# Altium PCB Rangkaian_Relay.PcbDoc
Units mm, origin at the board's own origin, x right, y up, seen from the top; angles counter-clockwise.
Board outline 152.4 x 101.6 mm, 2 copper layers (Top Layer, Bottom Layer); 8 components, 9 nets, 23 pads, 0 vias.
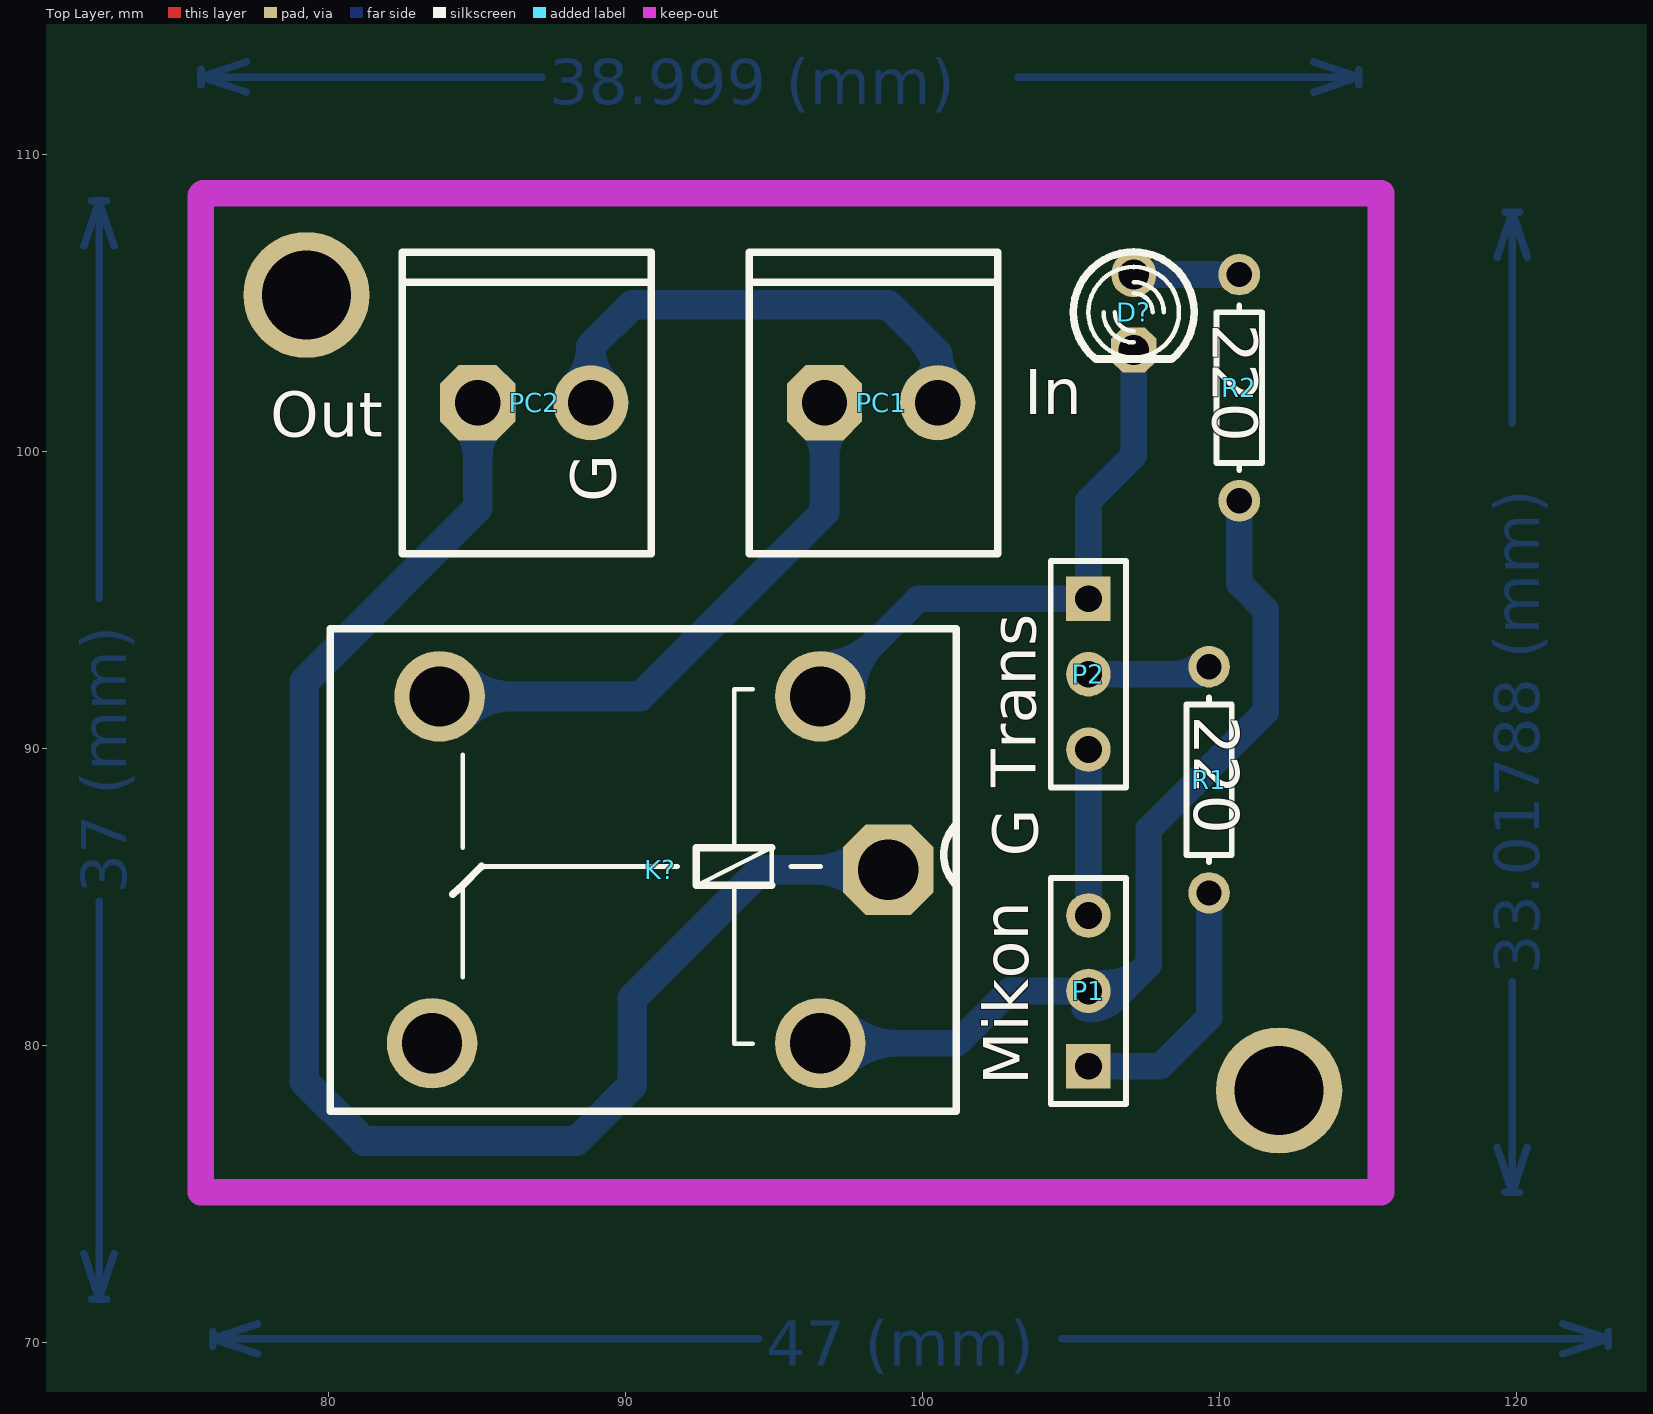
[diagram p0: Top Layer view]
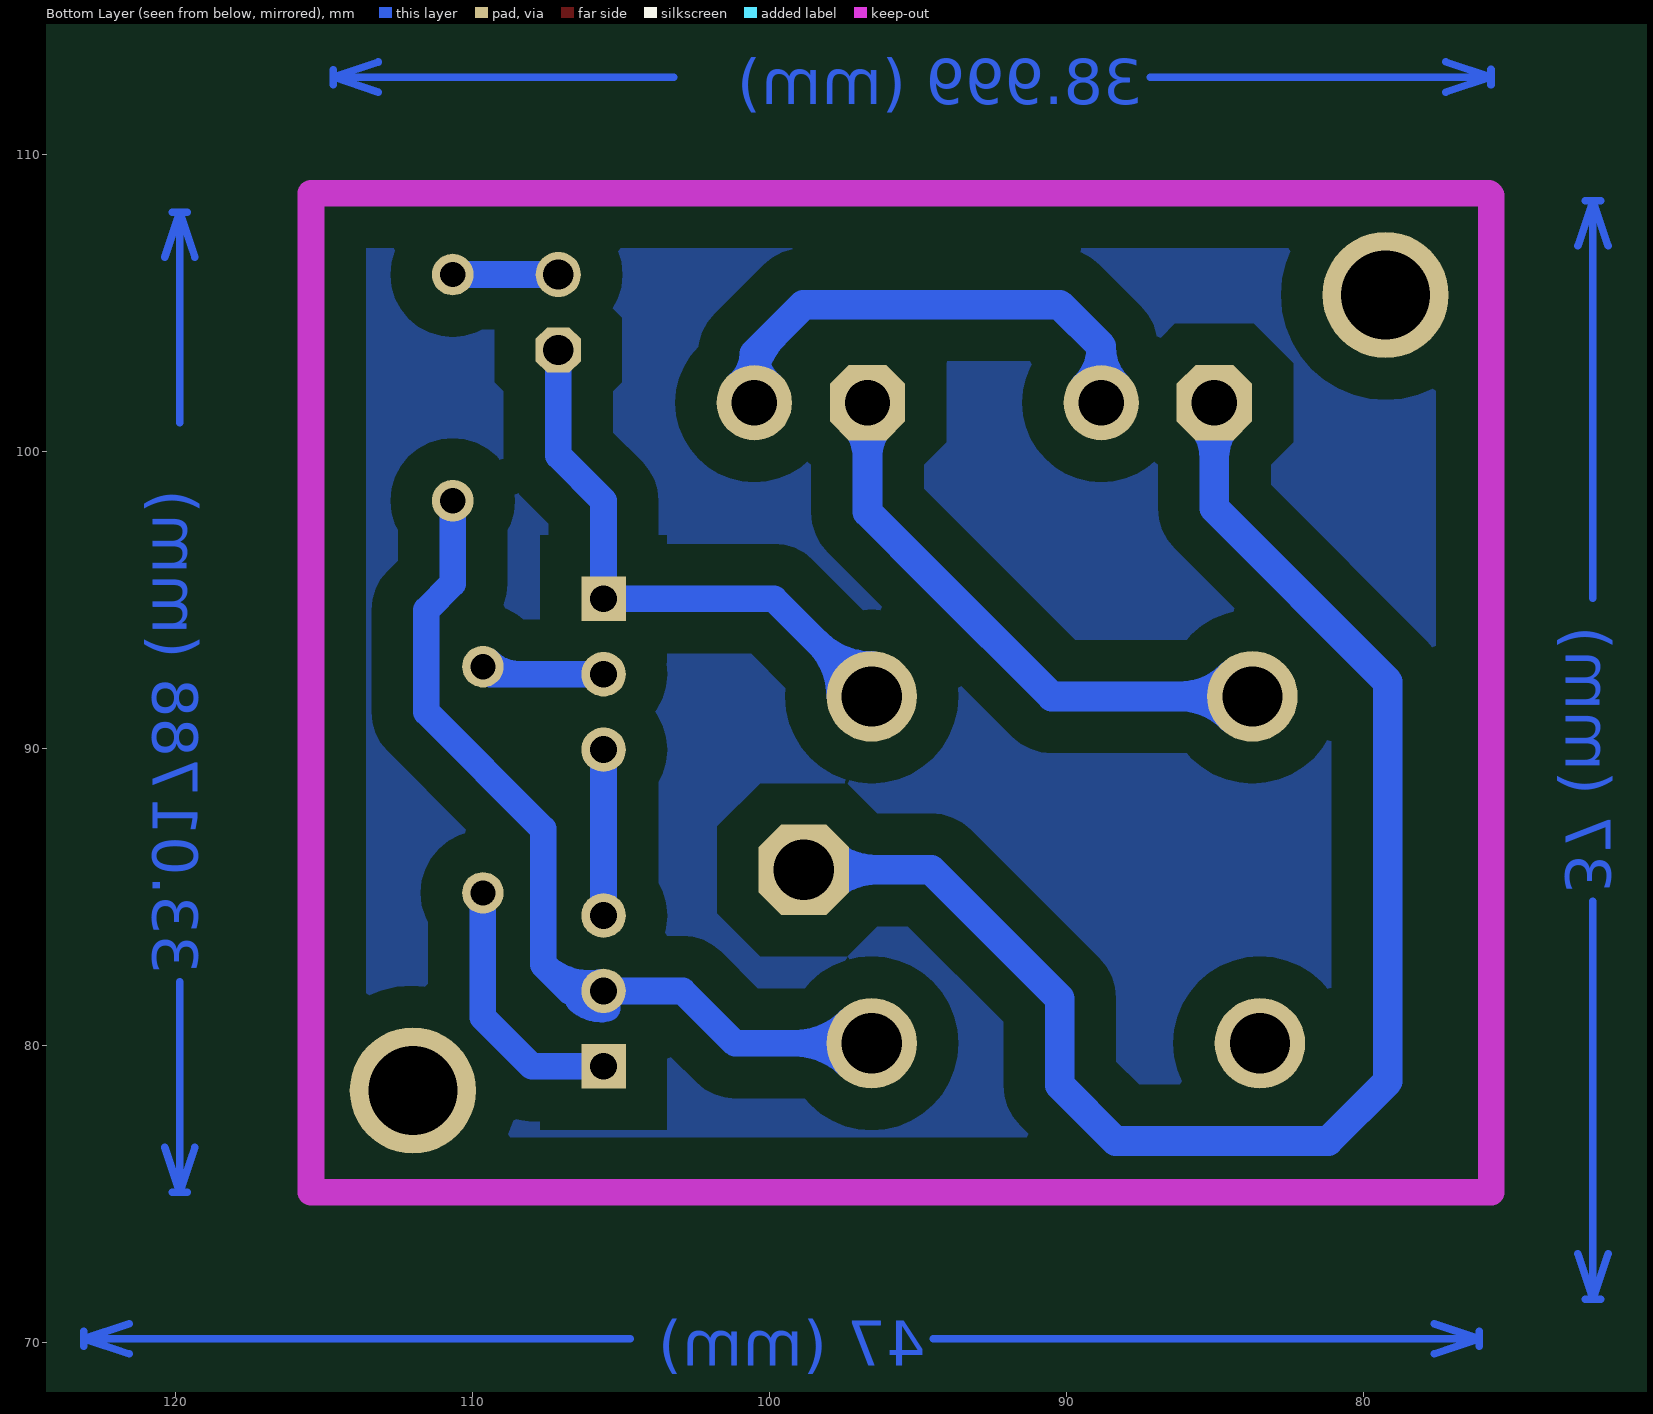
[diagram p1: Bottom Layer view, seen from below]

## Layer stack, top to bottom
Top Layer: signal copper 0.0356
Dielectric: dielectric 0.32, FR-4, Dk 4.8
Bottom Layer: signal copper 0.0356

## Board outline
25.4,25.4 177.8,25.4 177.8,127 25.4,127

## Design rules (kind name [scope] priority, off if disabled: settings)
Clearance [All] p1: gap=0.7
PolygonConnect [All] p1: connectstyle=Relief reliefconductorwidth=0.254 reliefentries=4 polygonreliefangle="90 Angle"
RoutingVias [All] p1: holewidth=0.711 width=1.27 viastyle="Through Hole" minholewidth=0.711 minwidth=1.27 maxholewidth=0.711 maxwidth=1.27
SilkscreenOverComponentPads [All] p1: minsilkscreentomaskgap=0.254
SolderMaskExpansion [All] p1: expansion=0.102
Width [All] p1: maxlimit=1 minlimit=0.8 preferedwidth=0.9
27 further rules are at their usual default settings.

## Components (designator, comment, footprint, x,y, rotation, side; value= is the part's Value field where it differs from the comment)
D? "LED" My_LED3MM 107.114,104.701 r270 top
K? "Relay-SPDT" My_rel 91.874,85.905 r270 top
P1 "Mikon" HDR1X3 105.59,79.301 r90 top
P2 "Trans" HDR1X3 105.59,95.049 r270 top
PC1 "In" "My_ Power_Connector" 92.89,106.733 r0 top
PC2 "Out" "My_ Power_Connector" 81.206,106.733 r0 top
R1 "220" AXIAL-0.3 109.654,88.953 r90 top
R2 "220" AXIAL-0.3 110.67,102.161 r90 top

## Footprints (in the part's own frame and the unit in brackets; to place one, negate y for a bottom-side part, rotate by r counter-clockwise, add the part's x,y. Pads: shape width x height; smd on the part's side, far side on the other; paste and mask are expansions set on the pad)
AXIAL-0.3 [mm] "Axial Device, Thru-Hole; 2 Leads; 0.3 in Pin Spacing"
  round 1.4 hole 0.85: 1(-3.81,0) 2(3.81,0)
  silkscreen extent -2.77,-0.76 2.77,0.76
HDR1X3 [mm] "Connector; Header; 3 Position"
  rect 1.5x1.5 hole 0.9: 1(0,0)
  round 1.5 hole 0.9: 2(2.54,0) 3(5.08,0)
  silkscreen extent -1.27,-1.27 6.35,1.27
"My_ Power_Connector" [mil]
  oct 100x100 hole 60: 1(150,-200)
  round 100 hole 60: 2(300,-200)
  silkscreen extent 50,-400 380,0
My_LED3MM [mil] "Typical RED GaAs LED; 2 Leads"
  round 60 hole 40: A(-50,0)
  oct 60x60 hole 40: K(50,0)
  silkscreen extent -80,-80 62,80
My_rel [mil]
  oct 120x120 hole 80: 1(-0.5,274.5)
  round 120 hole 80: 2(-230.5,-320.5) 3(229.5,-330.5) 4(-230.5,184.5) 5(229.5,184.5)
  silkscreen extent -321,-466 320,365

## Part data
D?: "Typical INFRARED GaAs LED"
K?: "standard single contact relay"
P1 P2: library part "Header 3", "Header, 3-Pin"
PC1 PC2: library part "Power Connector", "white Power Connector"
R1 R2: library part Res1, "Resistor"

## Free pads (board coordinates)
  round 4.25 hole 3: 0(79.248,105.283) 1(112.014,78.486)

## Nets (pads, with @x,y where several pads share a name; then routed paths per layer and width w, separated by ;. In a path a pad name is that pad's centre, name@x,y a point inside that pad or via, vN(x,y) a via of type N, cw(c..) or ccw(c..) an arc to the next point about the centre after c; other vN are vias at no path point)
GND: P1.3 P2.3 | length 5.6
  Bottom Layer w0.9: P1.3 P2.3
NetD?_A: D?.A R2.2 | length 3.6
  Bottom Layer w0.9: D?.A R2.2
NetD?_K: D?.K K?.4 P2.1 | length 23.5
  Bottom Layer w0.9: K?.4 99.85,95.049 P2.1 105.59,98.351 107.114,99.875 D?.K ; K?.4@96.561,92.834 ccw(c96.561,95.427) 98.394,93.593 ccw(c100.227,91.76) K?.4@97.635,91.76
NetK?_1: K?.1 PC2.1 | length 58.1
  Bottom Layer w1: PC2.1@84.472,101.109 cw(c83.157,99.794) 85.016,99.794 cw(c86.875,99.794) PC2.1@85.561,101.109 ; PC2.1 85.016,98.097 79.174,92.255 79.174,78.793 81.183,76.784 88.341,76.784 90.223,78.666 90.223,81.587 94.554,85.918 K?.1 ; K?.1@98.122,85.194 ccw(c96.374,83.446) 96.374,85.918 ccw(c96.374,88.39) K?.1@98.122,86.642
NetK?_2: K?.2 PC1.1 | length 26
  Bottom Layer w1: K?.2 90.49,91.76 94.488,95.758 96.7,97.97 PC1.1 ; K?.2@84.458,91.036 cw(c86.206,89.288) 86.206,91.76 cw(c86.206,94.232) K?.2@84.458,92.484 ; PC1.1@96.156,101.109 cw(c94.841,99.794) 96.7,99.794 cw(c98.559,99.794) PC1.1@97.245,101.109
NetP1_1: P1.1 R1.1 | length 8.9
  Bottom Layer w0.9: P1.1 108.003,79.301 109.654,80.952 R1.1
NetP2_2: P2.2 R1.2 | length 5.3
  Bottom Layer w0.9: P2.2 109.4,92.509 R1.2 ; 108.438,92.509 ccw(c108.438,93.98) R1.2@109.477,92.94
NetPC1_2: PC1.2 PC2.2 | length 24.5
  Bottom Layer w1: PC2.2@88.282,102.198 ccw(c86.967,103.512) 88.826,103.512 ccw(c90.685,103.512) PC2.2@89.371,102.198 ; PC2.2 88.826,103.558 90.223,104.955 98.859,104.955 100.51,103.304 ; 99.738,104.076 cw(c97.319,101.657) PC1.2@100.74,101.653 ; PC1.2@100.015,102.243 ccw(c99.125,103.304) 100.51,103.304 ; PC1.2 100.51,103.304 ; PC1.2@101.005,102.243 cw(c101.895,103.304) 100.51,103.304
VCC: K?.5 P1.2 R2.1 | length 37
  Bottom Layer w0.9: K?.5 101.158,80.076 102.923,81.841 P1.2 106.733,81.841 107.622,82.73 ; K?.5@97.32,79.317 cw(c99.153,77.483) 99.153,80.076 cw(c99.153,82.669) K?.5@97.32,80.835 ; P1.2@105.471,81.253 ccw(c105.683,82.298) 106.436,81.544 ; P1.2@105.65,82.135 ccw(c106.082,84.271) 107.622,82.73 ; R2.1 110.67,95.557 111.559,94.668 111.559,91.239 107.622,87.302 107.622,82.73
pads on no net: K?.3
copper on no net: | length 130.5
  Bottom Layer w0.254: 71.755,72.982 72.263,71.458 ; 71.755,106.934 72.263,108.458 ; 72.009,71.458 72.517,71.458 ; 72.009,108.458 72.517,108.458 ; 72.263,84.854 72.263,71.458 ; 72.263,95.062 72.263,108.458 ; 72.771,72.982 72.263,71.458 ; 72.771,106.934 72.263,108.458 ; 75.697,112.37 75.697,112.878 ; 76.092,69.869 76.092,70.377 ; 77.221,112.116 75.697,112.624 ; 77.221,113.132 75.697,112.624 ; 77.616,69.615 76.092,70.123 ; 77.616,70.631 76.092,70.123 ; 87.173,112.623 75.697,112.624 ; 94.488,70.123 76.092,70.123 ; 103.221,112.622 114.696,112.622 ; 104.696,70.123 123.092,70.123 ; 113.172,112.114 114.696,112.622 ; 113.172,113.13 114.696,112.622 ; 114.696,112.368 114.696,112.876 ; 119.355,76.579 119.863,75.055 ; 119.355,106.549 119.863,108.073 ; 119.609,75.055 120.117,75.055 ; 119.609,108.073 120.117,108.073 ; 119.863,82.144 119.863,75.055 ; 119.863,100.985 119.863,108.073 ; 120.371,76.579 119.863,75.055 ; 120.371,106.549 119.863,108.073 ; 121.568,69.615 123.092,70.123 ; 121.568,70.631 123.092,70.123 ; 123.092,69.869 123.092,70.377

## Polygon pours and split planes (outlines as drawn)
no net on Bottom Layer "Bottom Layer-No Net" (solid): 75.768,108.712 75.997,108.483 115.443,108.483 115.443,75.057 115.011,75.489 75.692,75.489 75.692,108.153 75.921,108.382

## Keep-outs
Keep-Out Layer:
  lines w0.9: 75.692,108.636 75.692,75.057 115.443,75.057 115.443,108.712 75.768,108.712

## Other copper
Bottom Layer:
  text "38.999 (mm)" at 87.427,111.709 h1.52
  text "37 (mm)" at 73.177,85.108 h1.52 r90
  text "33.01788 (mm)" at 120.777,82.398 h1.52 r90
  text "47 (mm)" at 94.742,69.209 h1.52

## Silkscreen, mask and mechanical layers (free items; w line width, h text height)
Top Overlay:
  text "G" at 89.662,98.298 h1.52 r90
  text "G" at 103.886,86.36 h1.52 r90